# Altium PCB CoinSensor _LMV321 v1.0.PcbDoc
Units mm, origin at the board's own origin, x right, y up, seen from the top; angles counter-clockwise.
Board outline 20 x 20 mm, 2 copper layers (Top Layer, Bottom Layer), stack 0.971 mm thick; 28 components, 13 nets, 56 pads, 28 vias.
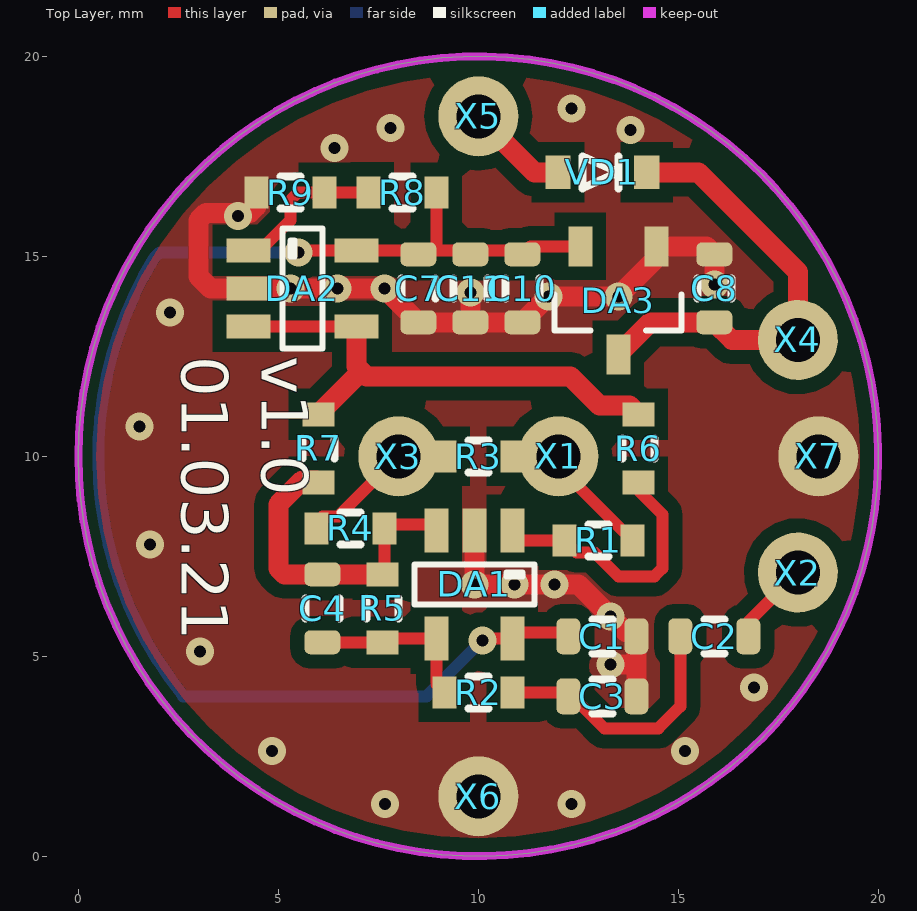
[diagram p0: Top Layer view]
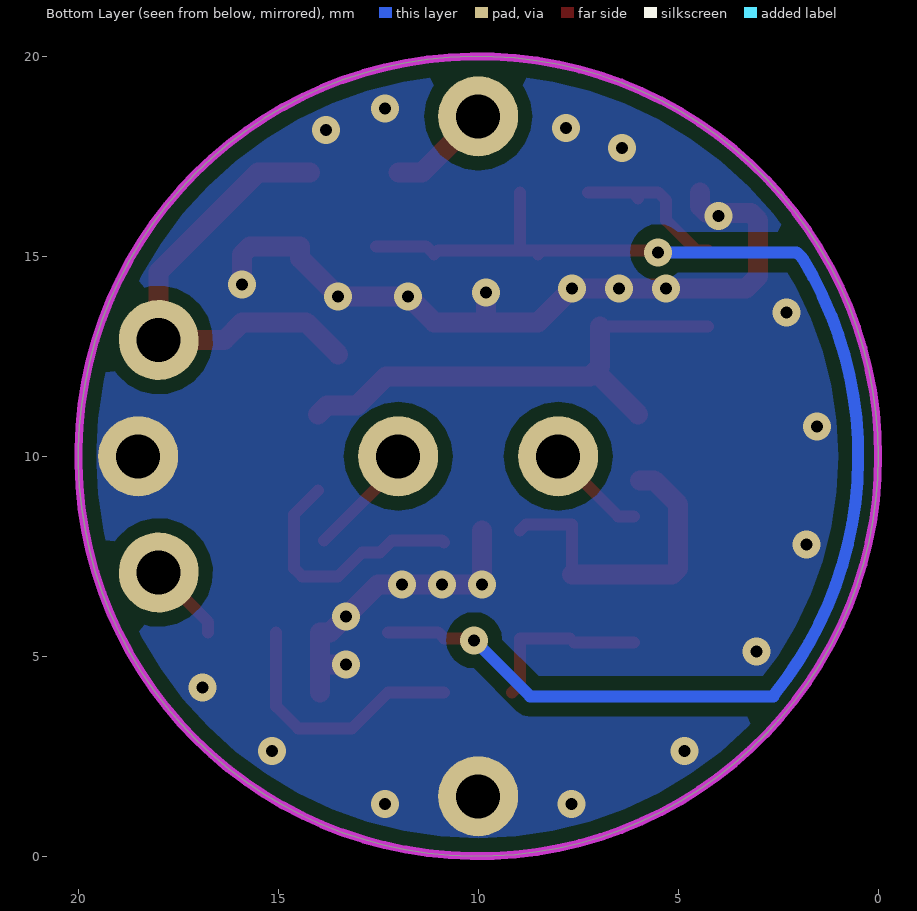
[diagram p1: Bottom Layer view, seen from below]

## Layer stack, top to bottom
Top Solder: solder mask 0.0102, Solder Resist, Dk 3.5
Top Layer: signal copper 0.0356
Dielectric 1: dielectric 0.9, FR-4, Dk 4.8
Bottom Layer: signal copper 0.0356
Bottom Solder: solder mask 0.0102, Solder Resist, Dk 3.5

## Board outline
19.998,9.8 cw(c10,10) 19.998,10.2

## Design rules (kind name [scope] priority, off if disabled: settings)
Clearance [All] p1: gap=0.2 except(0.35: Arc-Poly Track-Poly SMDPad-Poly THPad-Poly Via-Poly Fill-Poly Poly-Poly)
ComponentClearance "Clearance JMP" [(HasFootprint('Jumper NO RF'))] p1: gap=-1 collisioncheckmode=3 verticalgap=-0.5 showdistances=FALSE
ComponentClearance "Clearance TEST" [(HasFootprint('test point 1mm'))] p2: gap=-0.5 collisioncheckmode=3 verticalgap=-0.5 showdistances=FALSE
ComponentClearance "Clearance REG-JUMPER" [HasFootprint('SOT-23-5') vs (HasFootprint('RES 0603'))] p3: gap=-1.5 collisioncheckmode=3 verticalgap=-0.5 showdistances=FALSE
ComponentClearance "Clearance PLS" [HasFootprint('PLS-1')] p4: gap=0 collisioncheckmode=3 verticalgap=0 showdistances=FALSE
ComponentClearance [All] p5: gap=0.254 collisioncheckmode=3 verticalgap=0.254 showdistances=FALSE
Height [All] p1: minheight=0 maxheight=55 prefheight=12.7
HoleSize [All] p1: absolutevalues=TRUE maxlimit=3.5 minlimit=0.025 maxpercent=80.000 minpercent=20.000
MinimumSolderMaskSliver [All] p1: minsoldermaskwidth=0.01
PolygonConnect "Polygon to TEST PAD" [(HasFootprint('test point 1mm'))] p1: connectstyle=Direct reliefconductorwidth=0.254 reliefentries=4 polygonreliefangle="90 Angle" airgapwidth=0.254
PolygonConnect "Polygon to Battery" [HasFootprint('KEYS1042')] p2: connectstyle=Relief reliefconductorwidth=1 reliefentries=4 polygonreliefangle="90 Angle" airgapwidth=0.5
PolygonConnect "Polygon to VIA" [IsVia] p3: connectstyle=Direct reliefconductorwidth=0.254 reliefentries=4 polygonreliefangle="90 Angle" airgapwidth=0.254
PolygonConnect [All] p4: connectstyle=Direct reliefconductorwidth=0.3 reliefentries=4 polygonreliefangle="90 Angle" airgapwidth=0.4
RoutingVias [All] p1: holewidth=0.3 width=0.7 viastyle="Through Hole" minholewidth=0.3 minwidth=0.7 maxholewidth=1 maxwidth=2
SilkToSilkClearance [All] p1: silktosilkclearance=0.01
SilkToSolderMaskClearance [IsPad] p1: minsilkscreentomaskgap=0.01 clearancetoexposedcopper=TRUE
SolderMaskExpansion "SolderMask for VIA" [IsVia] p1: expansion=-0.5
SolderMaskExpansion [All] p2: expansion=0.102
ViasUnderSMD [All] p1: allowed=TRUE
Width [All] p1: maxlimit=1 minlimit=0.2 preferedwidth=0.2
24 further rules are at their usual default settings.

## Components (designator, comment, footprint, x,y, rotation, side; value= is the part's Value field where it differs from the comment)
C1 "100n" "CAP 0603" 13.1,5.5 r180 top
C2 "xx" "CAP 0603" 15.9,5.5 r0 top
C3 "xx" "CAP 0603" 13.1,4 r0 top
C4 "xx" "CAP 0603" 6.1,6.2 r270 top
C7 "1n" "CAP 0603" 8.5,14.2 r90 top
C8 "10u" "CAP 0603" 15.9,14.2 r270 top
C10 "100n" "CAP 0603" 11.1,14.2 r90 top
C11 "10u" "CAP 0603" 9.8,14.2 r90 top
DA1 "LMV321ILT" SOT-23-5 9.9,6.8 r270 top
DA2 "LMV321ILT" SOT-23-5 5.6,14.2 r0 top
DA3 "MCP1703" SOT-23A 13.5,13.9 r270 top
R1 "xx" "RES 0603" 13,7.9 r0 top
R2 "xx" "RES 0603" 10,4.1 r180 top
R3 "xx" "RES 0603" 10,10 r180 top
R4 "xx" "RES 0603" 6.8,8.2 r180 top
R5 "xx" "RES 0603" 7.6,6.2 r270 top
R6 "xx" "RES 0603" 14,10.2 r270 top
R7 "xx" "RES 0603" 6,10.2 r270 top
R8 "xx" "RES 0603" 8.1,16.6 r180 top
R9 "xx" "RES 0603" 5.3,16.6 r180 top
VD1 "diod" SOD-323 13.1,17.1 r180 top
X1 "INPUT" PLS-1 12,10 r0 top
X2 "+VOUT" PLS-1 17.987,7.093 r340 top
X3 "INPUT" PLS-1 8,10 r0 top
X4 "+VIN" PLS-1 17.987,12.907 r200 top
X5 "+BATT" PLS-1 10,18.5 r90 top
X6 "-BATT" PLS-1 10,1.5 r90 top
X7 "GND" PLS-1 18.5,10 r0 top

## Footprints (in the part's own frame and the unit in brackets; to place one, negate y for a bottom-side part, rotate by r counter-clockwise, add the part's x,y. Pads: shape width x height; smd on the part's side, far side on the other; paste and mask are expansions set on the pad)
"CAP 0603" [mm]
  rrect50% 0.6x0.9 smd mask+0.05: 1(-0.85,0) 2(0.85,0)
  silkscreen extent -0.25,-0.43 0.25,0.43, body extent -0.8,-0.4 0.8,0.4, height 0.8
PLS-1 [mm]
  round 2 hole 1.1: 1(0,0)
"RES 0603" [mm]
  rect 0.6x0.8 smd mask+0.05: 1(-0.85,0) 2(0.85,0)
  silkscreen extent -0.25,-0.4 0.25,0.4, body extent -0.77,-0.42 0.78,0.43, height 0.45
SOD-323 [mm]
  rect 0.63x0.83 smd: 1(-1.11,0) 2(1.11,0)
  silkscreen extent -0.4,-0.4 0.5,0.4, body extent -1.25,-0.62 1.25,0.63, height 1
SOT-23-5 [mm]
  rect 1.1x0.6 smd: 1(-1.35,0.95) 2(-1.35,0) 3(-1.35,-0.95) 4(1.35,-0.95) 5(1.35,0.95)
  silkscreen extent -0.5,-1.5 0.5,1.5, body extent -1.4,-1.45 1.4,1.45, height 1.45
SOT-23A [mm]
  rect 1x0.6 smd: 1(-1.35,0.95) 2(-1.35,-0.95) 3(1.35,0)
  silkscreen extent -0.14,-1.59 0.75,1.59, body extent -1.25,-1.46 1.23,1.46, height 1.02

## Part data
C1 C2 C3 C4 C7 C8 C10 C11: library part "Cap 0603", "Ceramic capacitor, SMD"
DA1 DA2: "Operation Amplifier, rail-to-rail"
DA3: "Voltage regulator, linear"
R1 R2 R3 R4 R5 R6 R7 R8 R9: library part "Res 0603", "Chip resistor, SMD"
VD1: library part RB751V40T1G, "Diode schottky"
X1 X2 X3 X4 X5 X6 X7: library part "IN-OUT pin"

## Via types
v1: diameter 0.7, hole 0.3, Top Layer to Bottom Layer, 28 vias

## Nets (pads, with @x,y where several pads share a name; then routed paths per layer and width w, separated by ;. In a path a pad name is that pad's centre, name@x,y a point inside that pad or via, vN(x,y) a via of type N, cw(c..) or ccw(c..) an arc to the next point about the centre after c; other vN are vias at no path point)
+3V3: C1.2 C7.2 C10.2 C11.2 DA1.5 DA2.5 DA3.2 R8.1 | length 34.4
  Top Layer w0.3: v1(5.5,15.1) 5.55,15.15 DA2.5 C7.2@8.4,15.15 ; C7.2 C7.2@8.4,15.15 ; R8.1 8.95,15.2 9,15.15 ; v1(10.1,5.4) 10.15,5.45 DA1.5 11,5.6 C1.2@12.25,5.6 ; DA3.2 11.3,15.25 C10.2 11,15.15 9,15.15 ; C7.2@8.4,15.15 9,15.15
  Bottom Layer w0.3: 2.621,4 8.7,4 v1(10.1,5.4) ; 2.621,4.017 cw(c10,10) 1.889,14.946 2.043,15.1 v1(5.5,15.1)
+VIN: C8.2 DA3.3 VD1.1 X4.1 | length 11.5
  Top Layer w0.5: DA3.3 14.3,13.35 C8.2 16.343,12.907 X4.1 17.987,14.613 15.5,17.1 VD1.1
GND: C1.1 C3.2 C7.1 C8.1 C10.1 C11.1 DA1.2 DA2.2 DA3.1 R9.2 X6.1 X7.1 | length 27.3
  Top Layer w0.5: R9.2 4.45,16.25 4.286,16.086 3.186,16.086 3,15.9 3,14.5 3.3,14.2 DA2.2 v1(7.65,14.2) C7.1 C11.1 ; v1(9.8,14.1) C11.1 ; DA1.2 v1(9.9,6.8) 12.5,6.8 13.7,5.6 13.95,5.6 13.95,4.8 ; v1(13.3,4.8) 13.95,4.8 ; C3.2@13.95,4.1 13.95,4.8 ; v1(15.9,14.3) C8.1 15.7,15.25 DA3.1 14.45,14.95 v1(13.5,14) v1(11.75,14) C10.1 C11.1
  other v1: 7.671,1.307 12.329,1.307 4.838,2.628 15.162,2.628 16.894,4.215 3.037,5.125 13.3,6 10.9,6.8 11.9,6.8 1.79,7.8 1.532,10.741 2.296,13.592 5.3,14.2 6.475,14.2 3.99,16.01 6.408,17.704 13.804,18.157 7.8,18.21 12.329,18.693
NetC2_1: C2.1 C3.1 R2.1 | length 6.7
  Top Layer w0.3: R2.1 12.25,4.1 13.15,3.2 14.5,3.2 15.05,3.75 C2.1@15.05,5.6
NetC2_2: C2.2 X2.1 | length 2
  Top Layer w0.3: C2.2@16.75,5.6 16.75,5.855 X2.1
NetC4_1: C4.1 DA1.3 R4.1 R5.1 R7.2 | length 8.1
  Top Layer w0.3: R5.1@7.65,7.05 R4.1 7.65,8.3 8.8,8.3 DA1.3
  Top Layer w0.5: R7.2@5.95,9.4 5.6,9.4 5,8.8 5,7.2 5.15,7.05 C4.1 R5.1 R5.1@7.65,7.05
NetC4_2: C4.2 DA1.4 R2.2 R5.2 | length 4.2
  Top Layer w0.3: C4.2 R5.2 ; R5.2@7.7,5.45 DA1.4 8.95,4.3 R2.2
NetDA1_1: DA1.1 R1.1 R6.2 | length 6.4
  Top Layer w0.3: DA1.1@10.85,7.85 10.9,7.9 R1.1 12.45,7.6 12.9,7.6 13.5,7 14.4,7 14.6,7.2 14.6,8.55 R6.2@14,9.15
NetDA2_1: DA2.1 R8.2 R9.1 | length 4.1
  Top Layer w0.3: DA2.1 4.55,15.15 5.3,15.9 5.3,16.4 5.5,16.6 R9.1 ; R9.1@6,16.45 R9.1 ; R8.2 R9.1
NetDA2_3: DA2.3 DA2.4 R6.1 R7.1 | length 12.8
  Top Layer w0.3: DA2.3 DA2.4
  Top Layer w0.5: R7.1 7.075,12.125 ; DA2.4 6.95,12.25 7.2,12 12.3,12 13.025,11.275 13.775,11.275 R6.1
NetR1_2: R1.2 R3.1 X1.1 | length 2.9
  Top Layer w0.3: X1.1 12,9.75 R1.2
NetR3_2: R3.2 R4.2 X3.1 | length 2.5
  Top Layer w0.3: R4.2@6.1,8.5 6.5,8.5 X3.1
NetVD1_2: VD1.2 X5.1 | length 2.6
  Top Layer w0.5: X5.1 11.4,17.1 VD1.2

## Polygon pours and split planes (outlines as drawn)
GND on Top Layer "Top Layer-No Net" (solid, remove dead copper, pour order 1): 19.998,9.8 cw(c10,10) 19.998,10.2
GND on Bottom Layer "Top Layer-No Net" (solid, remove dead copper, pour order 0): 19.998,9.8 cw(c10,10) 19.998,10.2

## Keep-outs
Keep-Out Layer:
  the board outline again, w0.2

## Silkscreen, mask and mechanical layers (free items; w line width, h text height)
Top Overlay:
  text "v1.0 / 01.03.21" at 2.2,12.5 h2 r270
Board:
  the board outline again, w0.2